# Altium PCB PX4FMUv1.7.1.PcbDoc (part 1 of 2)
Units mil, origin at the board's own origin, x right, y up, seen from the top; angles counter-clockwise.
Board outline 1988.19 x 1417.32 mil, 4 copper layers (Top, Route2, Route15, Bottom), stack 57.482 mil thick; 118 components, 107 nets, 492 pads, 250 vias.
Unrouted connection lines stored in the file: 62.
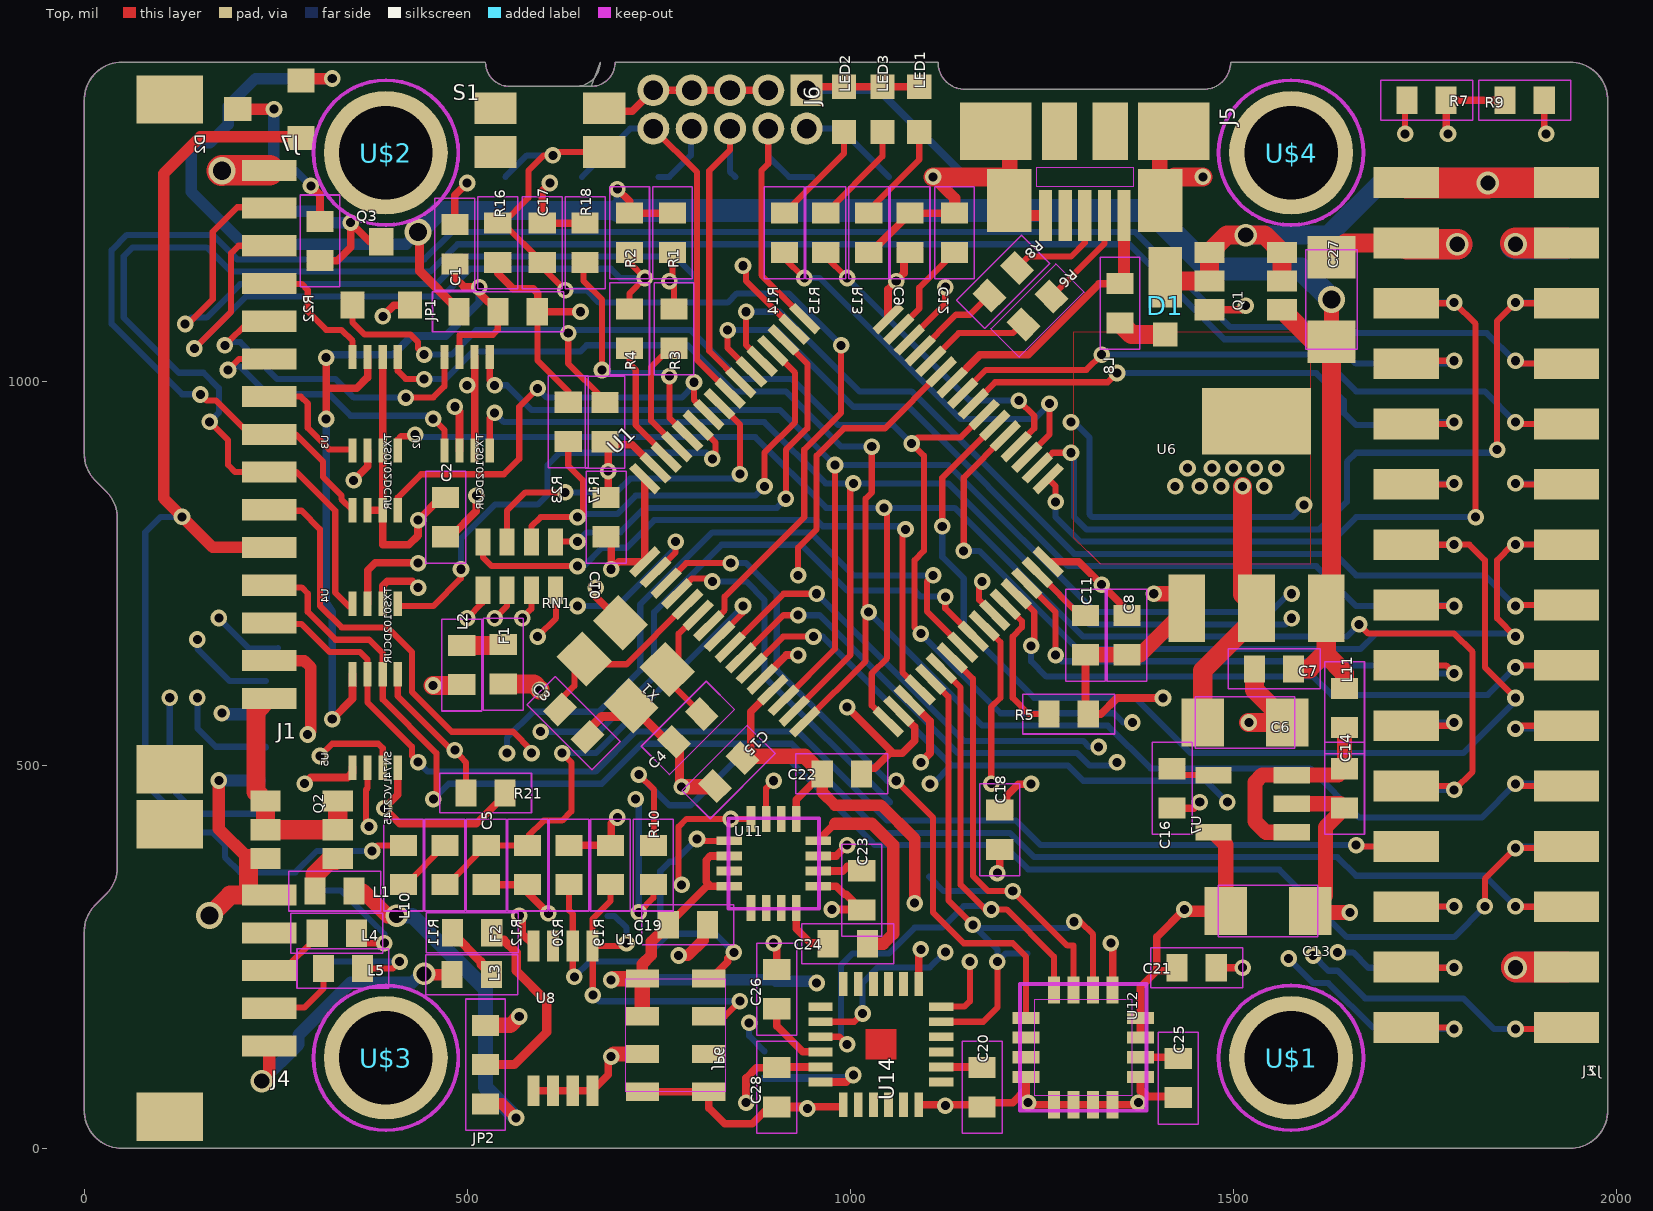
[diagram p0: Top view]
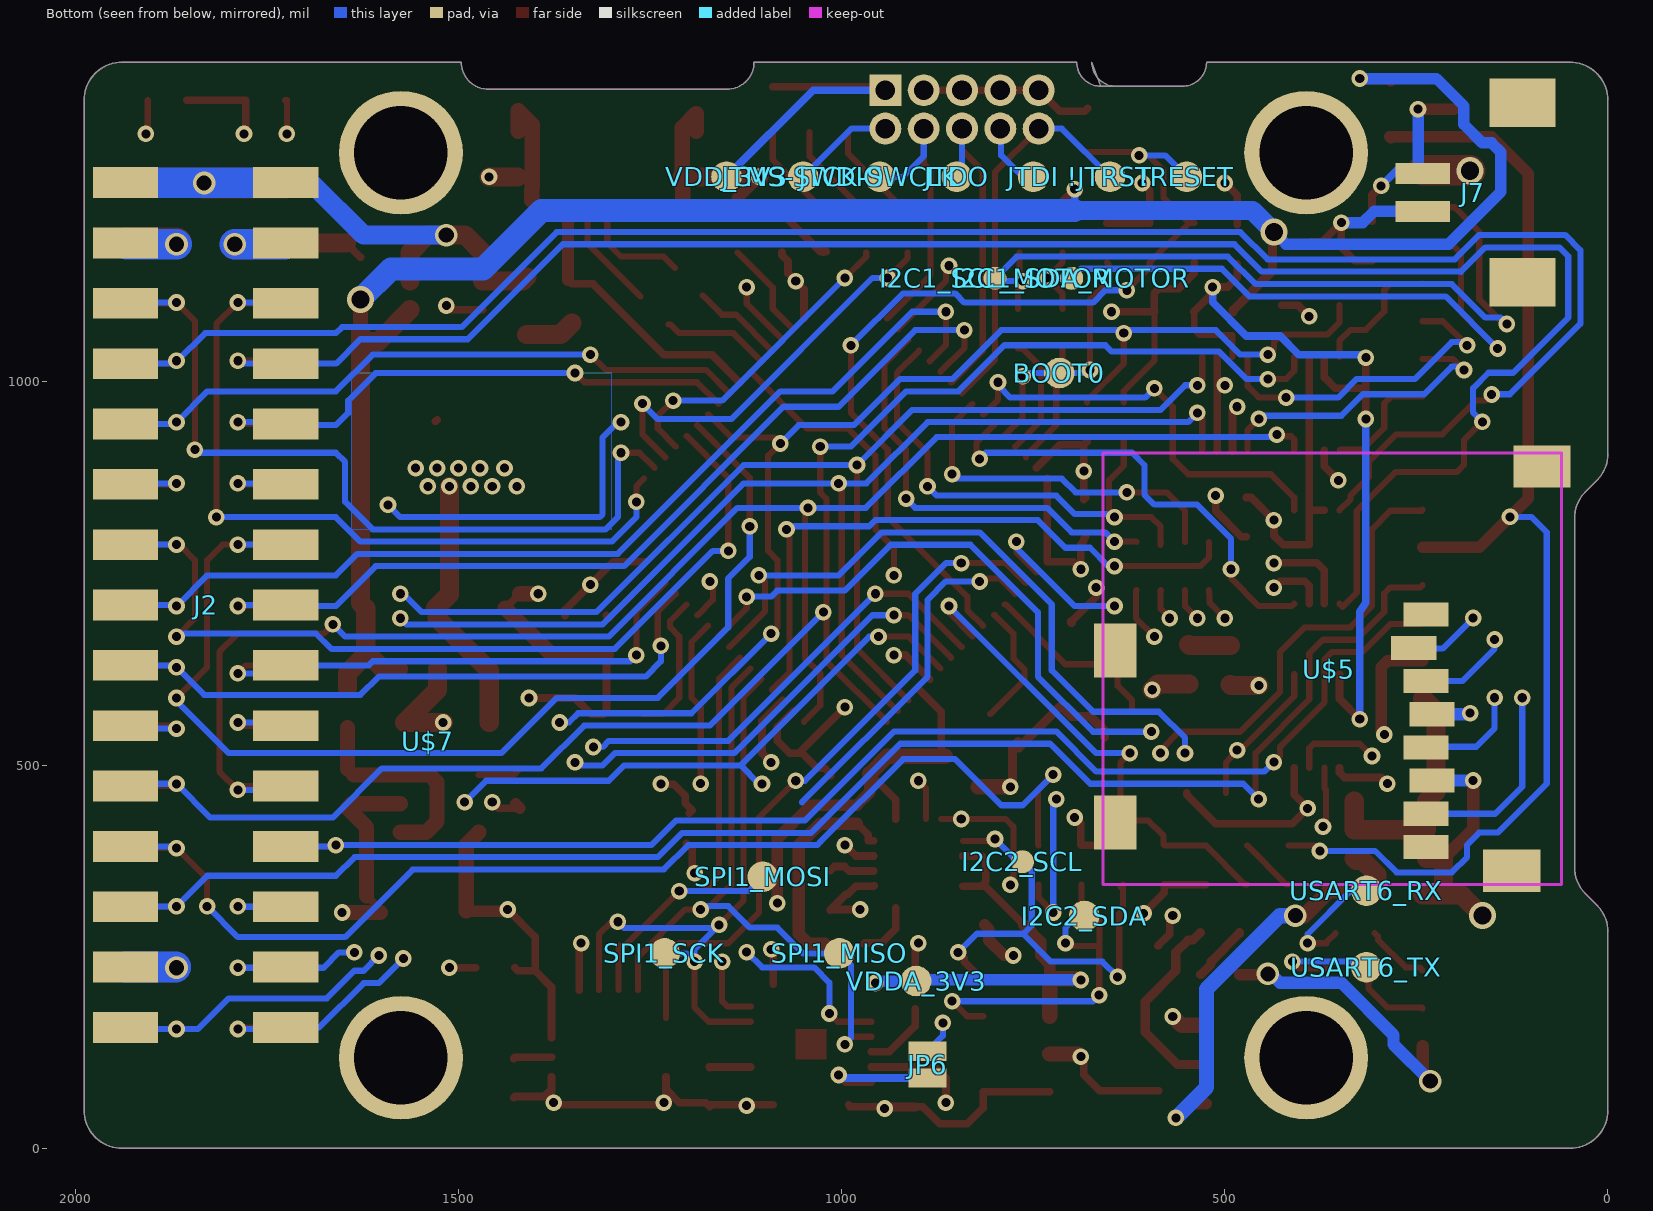
[diagram p1: Bottom view, seen from below]
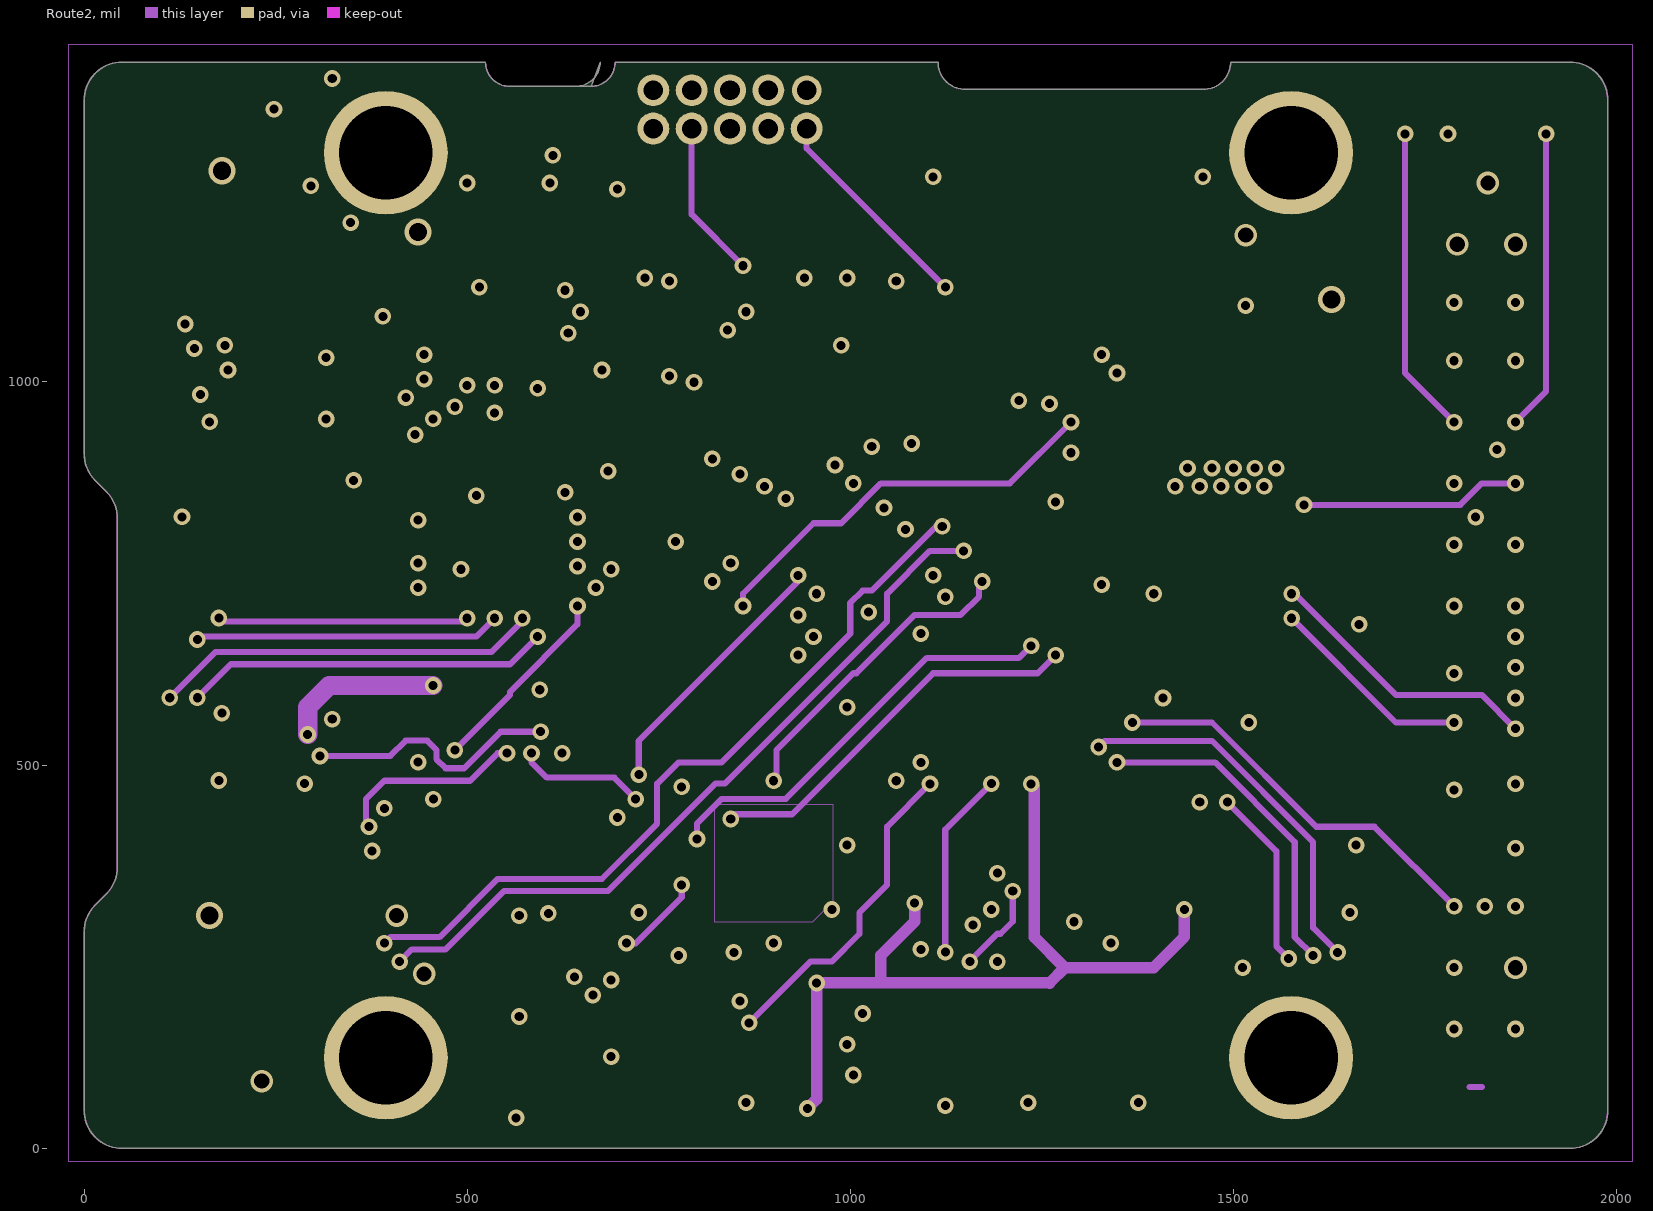
[diagram p2: Route2]
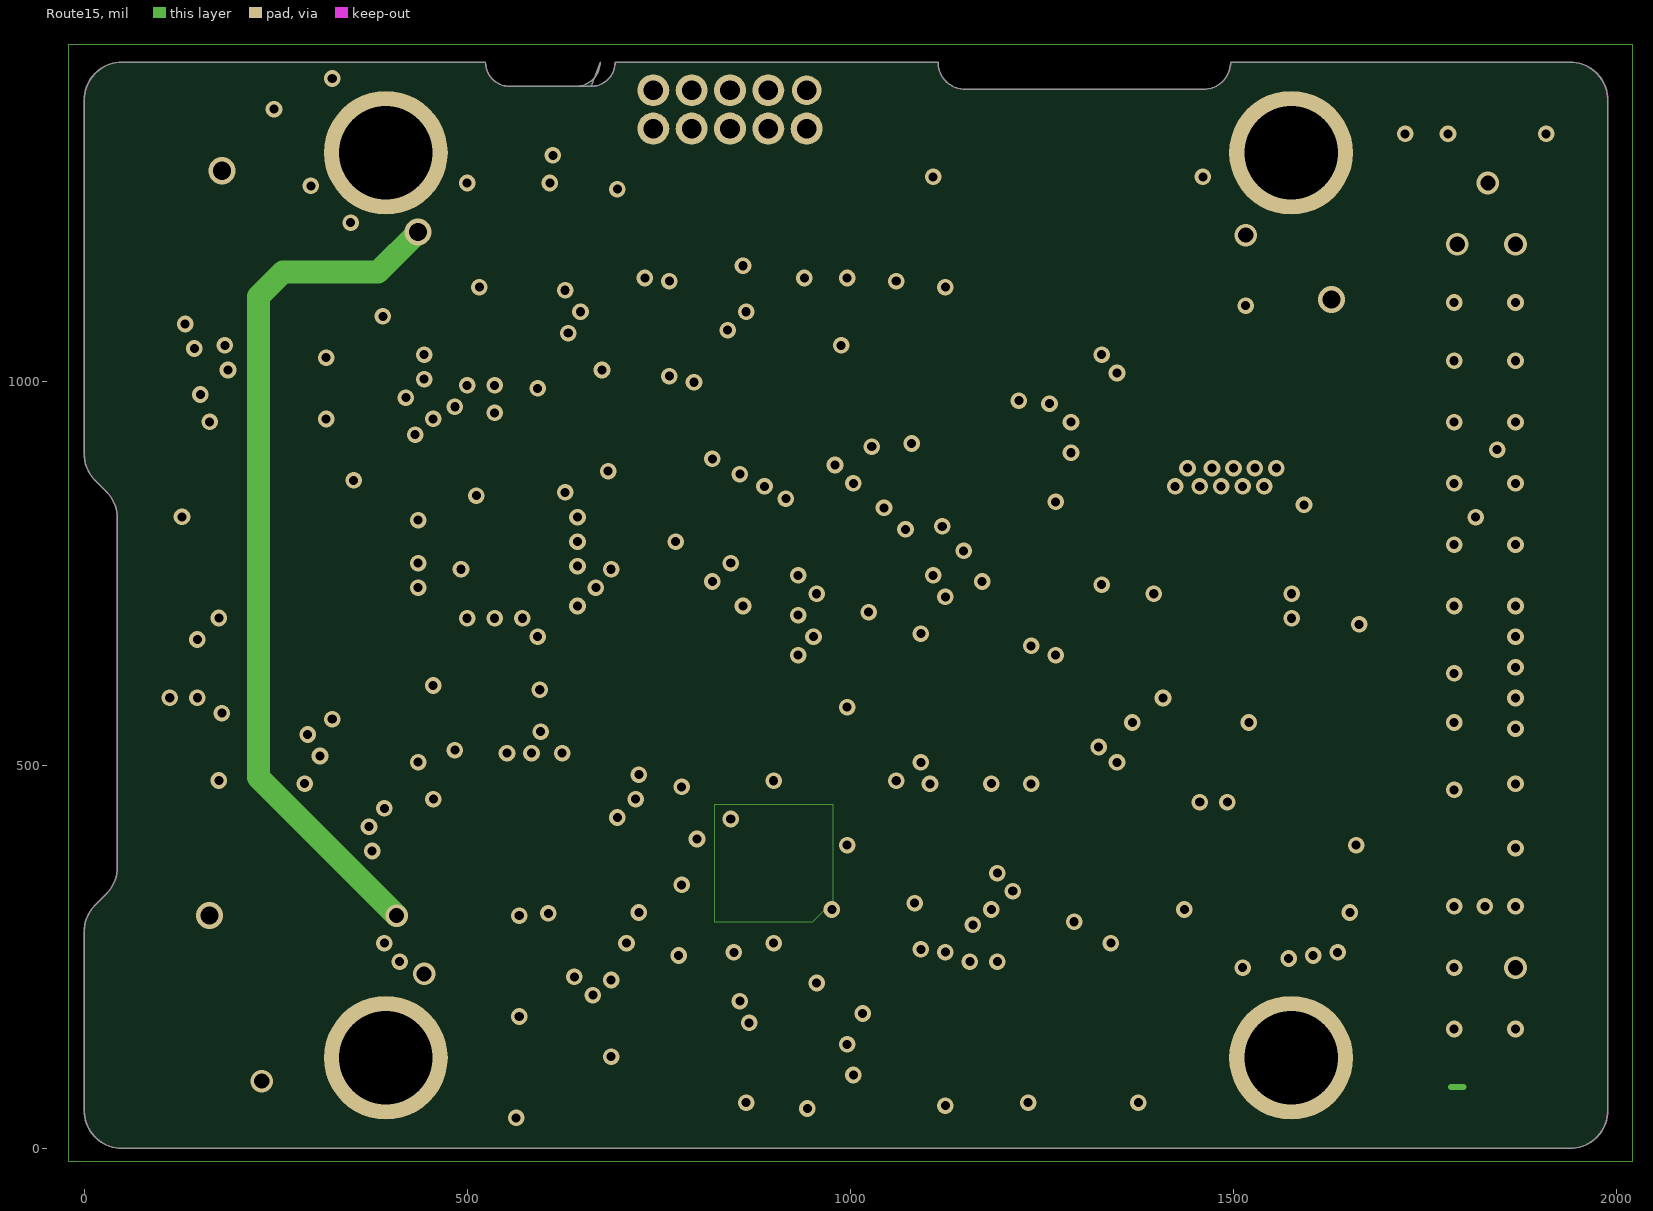
[diagram p3: Route15]

## Layer stack, top to bottom
Top Solder: solder mask 0.4, Solder Resist, Dk 3.5
Top: signal copper 1.378
Dielectric 1: core 19.685, FR-4, Dk 4.8
Route2: signal copper 1.378
Dielectric2: core 19.685, FR-4, Dk 4.8
Route15: signal copper 1.378
Dielectric3: dielectric 12.6, FR-4, Dk 4.8
Bottom: signal copper 1.378
Bottom Solder: solder mask 0.4, Solder Resist, Dk 3.5

## Board outline
661.42,1385.83 ccw(c661.43,1417.33) 692.92,1417.32 1114.18,1417.32 ccw(c1149.61,1417.32) 1149.61,1381.89 1460.63,1381.89 ccw(c1460.64,1417.33) 1496.07,1417.32 1938.98,1417.32 cw(c1938.98,1368.11) 1988.19,1368.11 1988.19,49.21 cw(c1938.98,49.21) 1938.98,0 49.22,0 cw(c49.22,49.22) 0,49.21 0,282.77 cw(c49.21,282.76) 14.42,317.56 28.9,332.04 ccw(c-5.9,366.83) 43.31,366.84 43.31,822.14 ccw(c-5.89,822.14) 28.9,856.93 14.42,871.41 cw(c49.22,906.22) 0,906.21 0,1368.11 cw(c49.22,1368.11) 49.22,1417.32 523.63,1417.32 ccw(c555.12,1417.32) 555.12,1385.83 661.42,1385.83 ccw(c641.74,1417.33)

## Design rules (kind name [scope] priority, off if disabled: settings)
BoardOutlineClearance mdCopperDimension [All] p1: gap=10 ignorepadtopadclearanceinfootprint=FALSE except(0: Arc-SplitContinuation Track-SplitContinuation SMDPad-SplitContinuation THPad-SplitContinuation Via-SplitContinuation Fill-SplitContinuation Poly-SplitContinuation Region-SplitContinuation Text-SplitContinuation; 7.87: Poly-OutlineEdge Poly-CavityEdge Poly-CutoutEdge Poly-SplitBarrior)
Clearance "Clearance (Same Net)" [All] p1: gap=5.91 ignorepadtopadclearanceinfootprint=FALSE
Clearance Clearance_for_NetClass_power [InNetClass('power') vs InNetClass('power')] p2: gap=8 ignorepadtopadclearanceinfootprint=FALSE
Clearance [All] p3: gap=5.91 ignorepadtopadclearanceinfootprint=FALSE
HoleSize HoleSize_For_NetClass_power [InNetClass('power')] p1: absolutevalues=TRUE maxlimit=11.81 minlimit=11.81 maxpercent=80.000 minpercent=20.000
HoleSize [All] p2: absolutevalues=TRUE maxlimit=100000 minlimit=11.81 maxpercent=80.000 minpercent=20.000
HoleToHoleClearance mdDrill [All] p1: gap=7.87 allowstackedmicrovias=TRUE
MinimumSolderMaskSliver [All] p1 off: minsoldermaskwidth=10
PasteMaskExpansion Expansion_SMDPaste_OFF [InPadClass('SMDPaste_OFF')] p1: expansion=0
PasteMaskExpansion mlMinCreamFrame [All] p2: expansion=-1
PolygonConnect PolygonConnect_For_PolygonThermal_ON_Width118100_Gap80000 [InPolygonClass('PolygonThermal_ON_Width118100_Gap80000') vs Not IsVia] p1: connectstyle=Relief reliefconductorwidth=11.81 reliefentries=4 polygonreliefangle="90 Angle" airgapwidth=8
PolygonConnect PolygonConnect_For_PolygonThermal_ON_Width100000_Gap80000 [InPolygonClass('PolygonThermal_ON_Width100000_Gap80000') vs Not IsVia] p2: connectstyle=Relief reliefconductorwidth=10 reliefentries=4 polygonreliefangle="90 Angle" airgapwidth=8
PolygonConnect PolygonConnect_For_PolygonThermal_ON_Width80000_Gap80000 [InPolygonClass('PolygonThermal_ON_Width80000_Gap80000') vs Not IsVia] p3: connectstyle=Relief reliefconductorwidth=8 reliefentries=4 polygonreliefangle="90 Angle" airgapwidth=8
PolygonConnect PolygonConnect_For_PolygonThermal_OFF [InPolygonClass('PolygonThermal_OFF')] p4: connectstyle=Direct reliefconductorwidth=10 reliefentries=4 polygonreliefangle="90 Angle" airgapwidth=10
PolygonConnect ThermalVias [IsVia] p5: connectstyle=Direct reliefconductorwidth=10 reliefentries=4 polygonreliefangle="90 Angle" airgapwidth=10
PolygonConnect [All] p6: connectstyle=Relief reliefconductorwidth=10 reliefentries=4 polygonreliefangle="90 Angle" airgapwidth=10
RoutingVias [All] p1: holewidth=11.81 width=21.65 viastyle="Through Hole" minholewidth=11.81 minwidth=21.65 maxholewidth=100 maxwidth=100
SolderMaskExpansion Expansion_SMDSolder_OFF [InPadClass('SMDSolder_OFF')] p1: expansion=0 istentingtop=FALSE
SolderMaskExpansion mlMinStopFrame [All] p2: expansion=1 istentingtop=FALSE
Width Width_For_NetClass_power [InNetClass('power')] p1: maxlimit=10 minlimit=10 preferedwidth=10
Width [All] p2: maxlimit=10000 minlimit=5.91 preferedwidth=5.91
26 further rules are at their usual default settings.

## Classes and differential pairs
polygon class PolygonThermal_ON_Width100000_Gap80000: Polygon_1_Net_GND Polygon_1_Net_POLY1 Polygon_1_Net_POLY2 Polygon_1_Net_VDD_3V3
polygon class PolygonThermal_ON_Width80000_Gap80000: Polygon_3_Net_VDD_3V3
polygon class PolygonThermal_OFF: Polygon_2_Net_VDD_3V3
pad class SMDSolder_OFF: RN1-1 RN1-2 RN1-3 RN1-4 RN1-5 RN1-6 RN1-7 RN1-8
pad class SMDPaste_OFF: !JTRST-P$1 !RESET-P$1 BOOT0-P$1 I2C1_SCL_MOTOR-P$1 I2C1_SDA_MOTOR-P$1 I2C2_SCL-P$1 I2C2_SDA-P$1 JP1-3 JP2-3 JP6-1 JP6-2 JTCK-SWCLK-P$1 JTDI-P$1 JTDO-P$1 JTMS-SWDIO-P$1 SPI1_MISO-P$1 SPI1_MOSI-P$1 SPI1_SCK-P$1 USART6_RX-P$1 USART6_TX-P$1 VDD_3V3-P$1 VDDA_3V3-P$1
net class power: GND N$23 N$24 N$27 N$100 VBUS VDD_3V3 VDD_3V3_ANALOG VDD_5V VDD_5V_IN VDD_IO

## Components (designator, comment, footprint, x,y, rotation, side; value= is the part's Value field where it differs from the comment)
!JTRST "" PAD.04X.04 649.61,1267.65 r225 bottom
!RESET "" PAD.04X.04 549.61,1267.65 r225 bottom
BOOT0 "" PAD.04X.04 715.69,1011.69 r180 bottom
C1 "0u1" 0402-CAP 483.69,1179.69 r90 top
C2 "0u1" 0402-CAP 471.69,823.68 r270 top
C3 "8p" 0402-CAP 638.76,554.76 r315 top
C4 "8p" 0402-CAP 787.76,548.61 r45 top
C5 "0u1" 0402-CAP 524.69,369.69 r270 top
C6 "10u" EIA3216 1514.69,555.68 r180 top
C7 "0u1" 0402-CAP 1552.69,625.68 r180 top
C8 "0u1" 0402-CAP 1360.69,669.68 r270 top
C9 "0u1" 0402-CAP 1077.69,1194.69 r90 top
C10 "0u1" 0402-CAP 681.08,823.68 r90 top
C11 "2u2" 0402-CAP 1306.69,669.68 r270 top
C12 "2u2" 0402-CAP 1135.69,1194.69 r90 top
C13 "10u" EIA3216 1544.69,309.69 r180 top
C14 "0u1" 0402-CAP 1644.69,469.69 r270 top
C15 "0u1" 0402-CAP 841.01,491.01 r225 top
C16 "470p" 0402-CAP 1419.69,469.69 r270 top
C17 "0u1" 0402-CAP 597.69,1181.69 r270 top
C18 "0u1" 0402-CAP 1194.69,415.69 r270 top
C19 "0u1" 0402-CAP 787.69,291.69 r0 top
C20 "0u01" 0402-CAP 1171.69,79.69 r270 top
C21 "0u1" 0402-CAP 1451.69,235.69 r0 top
C22 "0u1" 0402-CAP 988.69,488.69 r0 top
C23 "4u7" 0402-CAP 1014.69,336.69 r270 top
C24 "0u22" 0402-CAP 996.38,267 r0 top
C25 "0u01" 0402-CAP 1427.69,91.69 r270 top
C26 "2u2" 0402-CAP 903.69,207.69 r90 top
C27 "10u" EIA3216 1627.69,1107.69 r270 top
C28 "2u2" 0402-CAP 903.69,79.69 r90 top
D1 "MSS1P4-M3" MICROSMP 1410.69,1087.69 r270 top
D2 "BAT54C" SOT23-3 243.69,1356 r90 top
F1 "500mA" 0402-PTC 546.93,631.65 r90 top
F2 "200mA" 0402-PTC 506.31,281.29 r180 top
I2C1_SCL_MOTOR "" PAD.03X.03 799.64,1135.31 r180 bottom
I2C1_SDA_MOTOR "" PAD.03X.03 699.64,1135.31 r180 bottom
I2C2_SCL "" PAD.03X.03 763.91,374.02 r180 bottom
I2C2_SDA "" PAD.04X.04 683.08,303.15 r180 bottom
J1 "DF13-15P-1.25H" DF13A-15P-1.25H 111.69,931.69 r90 top
J2 "HEADER_2X15-REV" HEADER_2MM_2X15_REVERSE 1829.69,708.98 r270 bottom
J3 "HEADER_2X15" HEADER_2MM_2X15 1829.69,708.98 r90 top
J4 "DF13-5P-1.25H" DF13A-5P-1.25H 111.69,232 r90 top
J5 "47346-0001" MOLEX-47346-0001 1305.69,1327.37 r270 top
J6 "" FTSH-105-01-XXX-DV 942.69,1380.69 r180 top
J7 "DF13-2P-1.25H" DF13A-2P-1.25H 111.38,1248 r270 bottom
JP1 "0R" SJ_3_0603_PASTE1&2 565.69,1091.69 r180 top
JP2 "0R" SJ_3_0603_PASTE1&2 523.69,83.69 r90 top
JP6 "JUMPER-2" SJ_2 887.69,91.69 r270 bottom
JTCK-SWCLK "" PAD.04X.04 950.01,1267.65 r225 bottom
JTDI "" PAD.04X.04 749.61,1267.65 r225 bottom
JTDO "" PAD.04X.04 849.61,1267.65 r225 bottom
JTMS-SWDIO "" PAD.04X.04 1050.01,1267.65 r225 bottom
L1 "FERRITE" 0402-IND 326.69,335.69 r180 top
L2 "FERRITE" 0402-IND 492.69,630.68 r270 top
L3 "FERRITE" 0402-IND 505.69,226.69 r180 top
L4 "BLM15HD102SN1" 0402-IND 329.69,280.69 r180 top
L5 "BLM15HD102SN1" 0402-IND 337.69,234.69 r180 top
L8 "FERRITE" 0402-IND 1351.69,1102.69 r90 top
L10 "BLM15HD102SN1" 0402-IND 416.69,369.69 r90 top
L11 "FERRITE" 0402-IND 1644.69,574.68 r270 top
LED1 "GREEN" LED-0603 1089.69,1355.69 r180 top
LED2 "AMBER" LED-0603 991.69,1355.69 r180 top
LED3 "BLUE" LED-0603 1041.69,1355.69 r180 top
Q1 "NTGS4111P" TSOP-6@1 1515.69,1131.69 r270 top
Q2 "NTGS4111P" TSOP-6@1 283.69,415.69 r270 top
Q3 "ZXMS6004FFTA" SOT23-3 387.69,1139.69 r0 top
R1 "1K5" 0402-RES 767.69,1194.69 r90 top
R2 "1K5" 0402-RES 711.69,1194.69 r90 top
R3 "100" 0402-RES 769.69,1069.69 r90 top
R4 "100" 0402-RES 711.69,1069.69 r90 top
R5 "10K" 0402-RES 1284.69,566.68 r0 top
R6 "22R" 0402-RES 1243.95,1093.32 r225 top
R7 "1K5" 0402-RES 1751.69,1367.69 r0 top
R8 "22R" 0402-RES 1199.22,1130.73 r225 top
R9 "1K5" 0402-RES 1879.69,1367.69 r180 top
R10 "1K0" 0402-RES 742.69,369.69 r270 top
R11 "47K/0.1%" 0402-RES 470.69,369.69 r90 top
R12 "10K/0.1%" 0402-RES 578.69,369.69 r90 top
R13 "270R" 0402-RES 1023.69,1194.69 r90 top
R14 "270R" 0402-RES 913.69,1194.69 r90 top
R15 "82R" 0402-RES 967.69,1194.69 r90 top
R16 "10K" 0402-RES 539.69,1181.69 r270 top
R17 "10K" 0402-RES 679.69,947.69 r90 top
R18 "10K" 0402-RES 653.69,1181.69 r270 top
R19 "1K5" 0402-RES 686.69,369.69 r90 top
R20 "1K5" 0402-RES 632.69,369.69 r90 top
R21 "10K" 0402-RES 523.69,463.69 r180 top
R22 "10K" 0402-RES 307.69,1184 r90 top
R23 "10K" 0402-RES 631.69,948 r90 top
RN1 "CTS742C083" CTS742C083 567.69,759.68 r180 top
S1 "RESET" EVQP7J01K 607.69,1328.69 r180 top
SPI1_MISO "" PAD.04X.04 1002.68,254.33 r225 bottom
SPI1_MOSI "" PAD.04X.04 1102.68,354.33 r180 bottom
SPI1_SCK "" PAD.04X.04 1230.68,254.33 r225 bottom
U1 "STM32F405RGT6" TQFP64 994.69,819.68 r45 top
U2 "TXS0102DCUR" TI-DCU 499.69,971.69 r0 top
U3 "TXS0102DCUR" TI-DCU 379.69,971.69 r0 top
U4 "TXS0102DCUR" TI-DCU 379.69,771.68 r0 top
U5 "SN74LVC2T45" TI-DCU 379.69,557.68 r0 top
U6 "LD1117AS33" SOT-223 1529.69,826.68 r0 top
U7 "MIC5207" SOT23-5 1524.69,449.69 r90 top
U8 "128KBit EEPROM" MSOP-8 624.69,169.69 r0 top
U10 "MS5611-01BA" MS5611-01BA 771.69,147.69 r0 top
U11 "HMC5883L" HMC5883L-MAN 899.69,371.69 r0 top
U12 "L3GD20" L3G4200DH-MAN 1303.69,131.69 r270 top
U14 "MPU-6000" QFN-24 1039.69,135.69 r270 top
U$1 "" MOUNT-HOLE3.1 1574.81,118.11 r0 top
U$2 "" MOUNT-HOLE3.1 393.71,1299.21 r0 top
U$3 "" MOUNT-HOLE3.1 393.71,118.11 r0 top
U$4 "" MOUNT-HOLE3.1 1574.81,1299.21 r0 top
U$5 "" MICROSD 343.69,620 r270 bottom
U$7 "" OSHW-LOGO-S 1539.69,531.68 r180 bottom
USART6_RX "" PAD.04X.04 314.97,336.22 r180 bottom
USART6_TX "" PAD.04X.04 314.97,236.22 r180 bottom
VDD_3V3 "" PAD.04X.04 1150.01,1267.65 r225 bottom
VDDA_3V3 "" PAD.04X.04 902.68,218.33 r180 bottom
X1 "24 MHz 3.2x2.5mm 8-10pf" OSCILLATOR-3.2X2.5 706.69,631.68 r135 top

## Footprints (in the part's own frame and the unit in brackets; to place one, negate y for a bottom-side part, rotate by r counter-clockwise, add the part's x,y. Pads: shape width x height; smd on the part's side, far side on the other; paste and mask are expansions set on the pad)
0402-CAP [mm] "0402-CAP"
  rect 0.7x0.9 smd: 1(-0.65,0) 2(0.65,0)
  Top keep-out lines w0.051: -1.524,0.66 -1.524,-0.66 1.524,-0.66 1.524,0.66 -1.524,0.66
  body extent -1.55,-0.69 1.55,0.69, height 3.81
0402-IND [mm] "0402-IND"
  rect 0.7x0.9 smd: 1(-0.65,0) 2(0.65,0)
  Top keep-out lines w0.051: 1.524,0.66 1.524,-0.66 -1.524,-0.66 -1.524,0.66 1.524,0.66
  body extent -1.55,-0.69 1.55,0.69, height 3.81
0402-PTC [mm] "0402-PTC"
  rect 0.7x0.9 smd: 1(-0.65,0) 2(0.65,0)
  Top keep-out lines w0.051: -1.524,0.66 -1.524,-0.66 1.524,-0.66 1.524,0.66 -1.524,0.66
  body extent -1.55,-0.69 1.55,0.69, height 3.81
0402-RES [mm] "0402-RES"
  rect 0.7x0.9 smd: 1(-0.65,0) 2(0.65,0)
  Top keep-out lines w0.051: -1.524,0.66 -1.524,-0.66 1.524,-0.66 1.524,0.66 -1.524,0.66
  body extent -1.55,-0.69 1.55,0.69, height 3.81
CTS742C083 [mil] "CTS742C083"
  rect 19.69x35.43 smd mask+0: 1(-47.24,-31.5) 2(-15.75,-31.5) 3(15.75,-31.5) 4(47.24,-31.5) 5(47.24,31.5) 6(15.75,31.5) 7(-15.75,31.5) 8(-47.24,31.5)
  body extent -63,-51 63,51, height 150
DF13A-2P-1.25H [mil] "DF13A-2P-1.25H"
  rect 27.56x70.87 smd: 1(-23.82,-129.92) 2(25.39,-129.92)
  rect 62.99x86.61 smd: S1(117.91,0) S2(-116.34,0)
  body extent -148,-165 149,43, height 50
DF13A-5P-1.25H [mil] "DF13A-5P-1.25H"
  rect 27.56x70.87 smd: 1(-98.43,-129.92) 2(-49.21,-129.92) 3(0,-129.92) 4(49.21,-129.92) 5(98.43,-129.92)
  rect 62.99x86.61 smd: S1(190.94,0) S2(-190.94,0)
  body extent -222,-165 222,103, height 150
DF13A-15P-1.25H [mm] "DF13A-15P-1.25H"
  rect 0.7x1.8 smd: 1(-8.75,-3.3) 2(-7.5,-3.3) 3(-6.25,-3.3) 4(-5,-3.3) 5(-3.75,-3.3) 6(-2.5,-3.3) 7(-1.25,-3.3) 8(0,-3.3) 9(1.25,-3.3) 10(2.5,-3.3) 11(3.75,-3.3) 12(5,-3.3) 13(6.25,-3.3) 14(7.5,-3.3) 15(8.75,-3.3)
  rect 1.6x2.2 smd: S1(11.1,0) S2(-11.1,0)
  body extent -11.9,-4.2 11.9,2.61, height 3.81
EIA3216 [mil] "EIA3216"
  rect 55.12x62.99 smd: A(55.12,0) C(-55.12,0)
  Top keep-out lines w1.97: 64.96,33.46 64.96,-33.46 -64.96,-33.46 -64.96,33.46 64.96,33.46
  body extent -83,-38 83,38, height 150
EVQP7J01K [mil] "EVQP7J01K"
  rect 55.12x41.34 smd: A1(-70.87,28.54) A2(70.87,28.54) B3(-70.87,-28.54) B4(70.87,-28.54)
  body extent -98,-85 98,59, height 150
FTSH-105-01-XXX-DV [mm] "FTSH-105-01-XXX-DV"
  rect 1.06x1.06 / inner round 0.979 / far side rect 1.06x1.06 hole 0.65: 1(0,0)
  round 1.06 hole 0.65: 2(0,1.27) 3(1.27,0) 4(1.27,1.27) 5(2.54,0) 6(2.54,1.27) 7(3.81,0) 8(3.81,1.27) 9(5.08,0) 10(5.08,1.27)
  body extent -0.54,-0.54 5.62,1.81, height 1.27
HEADER_2MM_2X15 [mm] "HEADER_2MM_2X15"
  rect 1.02x2.16 smd: 1(14,-2.655) 2(14,2.655) 3(12,-2.655) 4(12,2.655) 5(10,-2.655) 6(10,2.655) 7(8,-2.655) 8(8,2.655) 9(6,-2.655) 10(6,2.655) 11(4,-2.655) 12(4,2.655) 13(2,-2.655) 14(2,2.655) 15(0,-2.655) 16(0,2.655) 17(-2,-2.655) 18(-2,2.655) 19(-4,-2.655) 20(-4,2.655) 21(-6,-2.655) 22(-6,2.655) 23(-8,-2.655) 24(-8,2.655) 25(-10,-2.655) 26(-10,2.655) 27(-12,-2.655) 28(-12,2.655) 29(-14,-2.655) 30(-14,2.655)
  body extent -15.36,-3.74 15.36,3.74, height 3.81
HEADER_2MM_2X15_REVERSE [mm] "HEADER_2MM_2X15_REVERSE"
  rect 1.02x2.16 smd: 1(-14,-2.655) 2(-14,2.655) 3(-12,-2.655) 4(-12,2.655) 5(-10,-2.655) 6(-10,2.655) 7(-8,-2.655) 8(-8,2.655) 9(-6,-2.655) 10(-6,2.655) 11(-4,-2.655) 12(-4,2.655) 13(-2,-2.655) 14(-2,2.655) 15(0,-2.655) 16(0,2.655) 17(2,-2.655) 18(2,2.655) 19(4,-2.655) 20(4,2.655) 21(6,-2.655) 22(6,2.655) 23(8,-2.655) 24(8,2.655) 25(10,-2.655) 26(10,2.655) 27(12,-2.655) 28(12,2.655) 29(14,-2.655) 30(14,2.655)
  body extent -14.51,-3.74 14.51,3.74, height 1.27
HMC5883L-MAN [mm] "HMC5883L-MAN"
  rect 0.85x0.285 smd: 1(-1.475,0.75) 2(-1.475,0.25) 3(-1.475,-0.25) 4(-1.475,-0.75) 9(1.475,-0.75) 10(1.475,-0.25) 11(1.475,0.25) 12(1.475,0.75)
  rect 0.285x0.85 smd: 5(-0.75,-1.475) 6(-0.25,-1.475) 7(0.25,-1.475) 8(0.75,-1.475) 13(0.75,1.475) 14(0.25,1.475) 15(-0.25,1.475) 16(-0.75,1.475)
  Top keep-out lines w0.127: -1.5,-1.5 -1.5,1.5 1.5,1.5 1.5,-1.5 -1.5,-1.5
  body extent -1.9,-1.9 1.9,1.9, height 3.81
L3G4200DH-MAN [mil] "L3G4200DH-MAN"
  rect 35.43x15.75 smd: 1(-74.8,38.39) 2(-74.8,12.8) 3(-74.8,-12.8) 4(-74.8,-38.39) 9(74.8,-38.39) 10(74.8,-12.8) 11(74.8,12.8) 12(74.8,38.39)
  rect 15.75x35.43 smd: 5(-38.39,-74.8) 6(-12.8,-74.8) 7(12.8,-74.8) 8(38.39,-74.8) 13(38.39,74.8) 14(12.8,74.8) 15(-12.8,74.8) 16(-38.39,74.8)
  Top keep-out region: -62.99,-62.99 -62.99,62.99 62.99,62.99 62.99,-62.99
  Top keep-out lines w5: 82.68,-82.68 -82.68,-82.68 -82.68,82.68 82.68,82.68 82.68,-82.68
  body extent -93,-93 93,93, height 150
LED-0603 [mil] "LED-0603"
  rect 31.5x31.5 smd: A(0,-29.53) C(0,29.53)
  body extent -16,-45 16,45, height 50
MICROSD [mil] "MICROSD"
  rect 31.5x59.06 smd: 1(-76.38,106.3) 2(-33.07,90.55) 3(10.24,106.3) 4(53.54,114.17) 5(96.85,106.3) 6(140.16,114.17) 7(183.46,106.3) 8(226.77,106.3)
  rect 55.12x74.8 smd: NC(-269.69,257.87) NC3(257.87,218.5)
  rect 70.87x55.12 smd: NC1(-29.53,-299.21) NC2(194.88,-299.21)
  Top keep-out lines w3.94: 275.59,283.46 275.59,-314.96 -287.4,-314.96 -287.4,283.46 275.59,283.46
  body extent -297,-327 285,295, height 150
MICROSMP [mil] "MICROSMP"
  rect 31.5x31.5 smd: ANODE(25.59,0)
  rect 78.74x43.31 smd: CATHODE(-49.21,0)
  body extent -89,-27 41,27, height 150
MOLEX-47346-0001 [mm] "MOLEX-47346-0001"
  rect 1.7x0.44 smd: D+(2.8,0) D-(2.8,0.65) GND(2.8,-1.3) ID(2.8,-0.65) VBUS(2.8,1.3)
  rect 1.9x2.375 smd: GND1(0,2.95) GND4(0,-2.95)
  rect 2.1x1.475 smd: GND2(2.3,2.5) GND3(2.3,-2.5)
  rect 1.9x1.175 smd: GND5(0,-0.837) GND6(0,0.837)
  Top keep-out region: 1.2,-1.6 1.2,1.6 1.85,1.6 1.85,-1.6
  body extent -2.36,-4.76 3.76,4.66, height 3.81
MOUNT-HOLE3.1 [mil] "MOUNT-HOLE3.1"
  round 161.42 hole 122.05: P$1(0,0)
  Top keep-out circle w5: c0,0 r94.49
  body extent -97,-97 97,97, height 150
MS5611-01BA [mil] "MS5611-01BA"
  rect 43.31x23.62 smd: 1(-43.31,73.82) 2(-43.31,24.61) 3(-43.31,-24.61) 4(-43.31,-73.82) 5(43.31,-73.82) 6(43.31,-24.61) 7(43.31,24.61) 8(43.31,73.82)
  Top keep-out region: -64.96,-73.82 -64.96,73.82 64.96,73.82 64.96,-73.82
  body extent -65,-101 65,101, height 150
MSOP-8 [mil] "MSOP-8"
  rect 15.75x40.16 smd: 1(-38.39,-94.49) 2(-12.8,-94.49) 3(12.8,-94.49) 4(38.39,-94.49) 5(38.39,94.49) 6(12.8,94.49) 7(-12.8,94.49) 8(-38.39,94.49)
  body extent -63,-115 63,115, height 150
OSCILLATOR-3.2X2.5 [mil] "OSCILLATOR-3.2X2.5"
  rect 55.12x47.24 smd: 1(-43.31,-33.46) 2(43.31,-33.46) 3(43.31,33.46) 4(-43.31,33.46)
  body extent -71,-57 71,57, height 50
OSHW-LOGO-S [mil] "OSHW-LOGO-S"
PAD.03X.03 [mil] "PAD.03X.03"
  rrect100% 30x30 smd paste+0: P$1(0,0)
  body extent -15,-15 15,15, height 50
PAD.04X.04 [mil] "PAD.04X.04"
  rrect100% 40x40 smd paste+0: P$1(0,0)
  body extent -20,-20 20,20, height 50
QFN-24 [mil] "QFN-24"
  rect 31.5x11.42 smd: 1(-78.74,49.21) 2(-78.74,29.53) 3(-78.74,9.84) 4(-78.74,-9.84) 5(-78.74,-29.53) 6(-78.74,-49.21) 13(78.74,-49.21) 14(78.74,-29.53) 15(78.74,-9.84) 16(78.74,9.84) 17(78.74,29.53) 18(78.74,49.21)
  rect 11.42x31.5 smd: 7(-49.21,-78.74) 8(-29.53,-78.74) 9(-9.84,-78.74) 10(9.84,-78.74) 11(29.53,-78.74) 12(49.21,-78.74) 19(49.21,78.74) 20(29.53,78.74) 21(9.84,78.74) 22(-9.84,78.74) 23(-29.53,78.74) 24(-49.21,78.74)
  Top region: -19.69,-19.69 -19.69,19.69 19.69,19.69 19.69,-19.69
  body extent -94,-94 94,94, height 150
SJ_2 [mil] "SJ_2"
  rect 25x50 smd paste+0: 1(-35,0) 2(0,0)
  body extent -48,-25 13,25, height 50
SJ_3_0603_PASTE1&2 [mm] "SJ_3_0603_PASTE1&2"
  rect 0.7x0.9 smd: 1(-0.65,0) 2(0.65,0)
  rect 0.7x0.9 smd paste+0: 3(1.95,0)
  Top keep-out lines w0.051: 2.824,0.66 2.824,-0.66 -1.524,-0.66 -1.524,0.66 2.824,0.66
  body extent -1.55,-0.69 2.85,0.69, height 3.81
SOT23-3 [mil] "SOT23-3"
  rect 31.5x35.43 smd: 1(-37.4,-39.37) 2(37.4,-39.37) 3(0,43.31)
  body extent -59,-57 59,61, height 150
SOT23-5 [mil] "SOT23-5"
  rect 21.65x47.24 smd: 1(-37.4,-51.19) 2(0,-51.19) 3(37.4,-51.19) 4(37.4,51.19) 5(-37.4,51.19)
  body extent -58,-75 58,75, height 150
SOT-223 [mil] "SOT-223"
  rect 48x88 smd: 1(-91,-122) 2(0,-122) 3(91,-122)
  rect 141.73x86.61 smd: 4(0,122.01)
  body extent -115,-166 115,165, height 150
TI-DCU [mil] "TI-DCU"
  rect 10.63x31.5 smd: 1(-29.53,-61.02) 2(-9.84,-61.02) 3(9.84,-61.02) 4(29.53,-61.02) 5(29.53,61.02) 6(9.84,61.02) 7(-9.84,61.02) 8(-29.53,61.02)
  body extent -45,-77 45,77, height 150
TQFP64 [mm] "TQFP64"
  rect 1.2x0.29 smd: 1(-5.7,3.75) 2(-5.7,3.25) 3(-5.7,2.75) 4(-5.7,2.25) 5(-5.7,1.75) 6(-5.7,1.25) 7(-5.7,0.75) 8(-5.7,0.25) 9(-5.7,-0.25) 10(-5.7,-0.75) 11(-5.7,-1.25) 12(-5.7,-1.75) 13(-5.7,-2.25) 14(-5.7,-2.75) 15(-5.7,-3.25) 16(-5.7,-3.75) 33(5.7,-3.75) 34(5.7,-3.25) 35(5.7,-2.75) 36(5.7,-2.25) 37(5.7,-1.75) 38(5.7,-1.25) 39(5.7,-0.75) 40(5.7,-0.25) 41(5.7,0.25) 42(5.7,0.75) 43(5.7,1.25) 44(5.7,1.75) 45(5.7,2.25) 46(5.7,2.75) 47(5.7,3.25) 48(5.7,3.75)
  rect 0.29x1.2 smd: 17(-3.75,-5.7) 18(-3.25,-5.7) 19(-2.75,-5.7) 20(-2.25,-5.7) 21(-1.75,-5.7) 22(-1.25,-5.7) 23(-0.75,-5.7) 24(-0.25,-5.7) 25(0.25,-5.7) 26(0.75,-5.7) 27(1.25,-5.7) 28(1.75,-5.7) 29(2.25,-5.7) 30(2.75,-5.7) 31(3.25,-5.7) 32(3.75,-5.7) 49(3.75,5.7) 50(3.25,5.7) 51(2.75,5.7) 52(2.25,5.7) 53(1.75,5.7) 54(1.25,5.7) 55(0.75,5.7) 56(0.25,5.7) 57(-0.25,5.7) 58(-0.75,5.7) 59(-1.25,5.7) 60(-1.75,5.7) 61(-2.25,5.7) 62(-2.75,5.7) 63(-3.25,5.7) 64(-3.75,5.7)
  body extent -6.3,-6.3 6.3,6.3, height 3.81
TSOP-6@1 [mm] "TSOP-6@1"
  rect 0.7x1 smd: 1(-0.95,-1.2) 2(0,-1.2) 3(0.95,-1.2) 4(0.95,1.2) 5(0,1.2) 6(-0.95,1.2)
  body extent -1.61,-1.7 1.61,1.7, height 3.81

## Part data
!JTRST !RESET BOOT0 I2C2_SDA JTCK-SWCLK JTDI JTDO JTMS-SWDIO SPI1_MISO SPI1_MOSI SPI1_SCK USART6_RX USART6_TX VDD_3V3 VDDA_3V3: library part PAD.04X.04, PackageName=PAD.04X.04
C1 C2 C3 C4 C5 C7 C8 C9 C10 C11 C12 C14 C15 C16 C17 C18 C19 C20 C21 C22 C23 C24 C25 C26 C28: library part 0402-CAP, PackageName=0402-CAP
C6 C13 C27: library part EIA3216, PackageName=EIA3216
D1: library part MICROSMP, PackageName=MICROSMP
D2 Q3: library part SOT23-3, PackageName=SOT23-3
F1 F2: library part 0402-PTC, PackageName=0402-PTC
I2C1_SCL_MOTOR I2C1_SDA_MOTOR I2C2_SCL: library part PAD.03X.03, PackageName=PAD.03X.03
J1: library part DF13A-15P-1.25H, PackageName=DF13A-15P-1.25H
J2: library part HEADER_2MM_2X15_REVERSE, PackageName=HEADER_2MM_2X15_REVERSE
J3: library part HEADER_2MM_2X15, PackageName=HEADER_2MM_2X15
J4: library part DF13A-5P-1.25H, PackageName=DF13A-5P-1.25H
J5: library part MOLEX-47346-0001, PackageName=MOLEX-47346-0001
J6: library part FTSH-105-01-XXX-DV, PackageName=FTSH-105-01-XXX-DV
J7: library part DF13A-2P-1.25H, PackageName=DF13A-2P-1.25H
JP1 JP2: library part SJ_3_0603_PASTE1&2, PackageName=SJ_3_0603_PASTE1&2
JP6: library part SJ_2, PackageName=SJ_2
L1 L2 L3 L4 L5 L8 L10 L11: library part 0402-IND, PackageName=0402-IND
LED1 LED2 LED3: library part LED-0603, PackageName=LED-0603
Q1 Q2: library part TSOP-6@1, PackageName=TSOP-6@1
R1 R2 R3 R4 R5 R6 R7 R8 R9 R10 R11 R12 R13 R14 R15 R16 R17 R18 R19 R20 R21 R22 R23: library part 0402-RES, PackageName=0402-RES
S1: library part EVQP7J01K, PackageName=EVQP7J01K
U1: library part TQFP64, PackageName=TQFP64
U2 U3 U4 U5: library part TI-DCU, PackageName=TI-DCU
U6: library part SOT-223, PackageName=SOT-223
U7: library part SOT23-5, PackageName=SOT23-5
U8: library part MSOP-8, PackageName=MSOP-8
U11: library part HMC5883L-MAN, PackageName=HMC5883L-MAN
U12: library part L3G4200DH-MAN, PackageName=L3G4200DH-MAN
U14: library part QFN-24, PackageName=QFN-24
U$1 U$2 U$3 U$4: library part MOUNT-HOLE3.1, PackageName=MOUNT-HOLE3.1
U$5: library part MICROSD, PackageName=MICROSD
U$7: library part OSHW-LOGO-S, PackageName=OSHW-LOGO-S
X1: library part OSCILLATOR-3.2X2.5, PackageName=OSCILLATOR-3.2X2.5
RN1: PackageName=CTS742C083
U10: PackageName=MS5611-01BA

## Via types
v1: diameter 21.65/21.65/21.65/21.65 (per signal layer), hole 11.81, Top to Bottom, 238 vias
v2: diameter 29.54/29.54/29.54/29.54 (per signal layer), hole 19.69, Top to Bottom, 8 vias
v3: diameter 35.43/35.43/35.43/35.43 (per signal layer), hole 23.62, Top to Bottom, 4 vias

## Nets (pads, with @x,y where several pads share a name; then routed paths per layer and width w, separated by ;. In a path a pad name is that pad's centre, name@x,y a point inside that pad or via, vN(x,y) a via of type N, cw(c..) or ccw(c..) an arc to the next point about the centre after c; other vN are vias at no path point)
!JTRST: !JTRST.P$1 J6.10 U1.56 | length 506.1
  Top w8: J6.10@742.69,1330.69 799.69,1273.69 799.69,1028.6 U1.56@842.97,985.32
  Bottom w8: !JTRST.P$1@649.61,1267.65 712.64,1330.69 J6.10@742.69,1330.69
ACCEL_CS: U1.4 | length 466.1
  Top w8: U1.4@773.37,723.63 793.42,743.68 815.69,743.68 v1(819.69,739.68)
  Bottom w8: v1(819.69,739.68) 863.69,739.68 887.69,715.68 887.69,615.68 1051.69,451.69
ADC123_IN10: C5.1 J2.11 J3.11 R11.1 R12.2 U1.8 | length 2039.2
  Top w8: R11.1@470.69,344.1 473.51,344.09 C5.1@524.69,395.28 R12.2@578.69,395.28 579.69,396.28 579.69,407.69 599.69,427.69 623.69,427.69 635.69,439.69 635.69,503.69 v1(623.69,515.68) ; U1.8@829.05,667.96 859.69,698.6 v1(859.69,707.68) ; v1(1867.69,867.69) 1868.92,866.46 J3.11@1934.22,866.46
  Route2 w8: v1(859.69,707.68) 859.69,723.68 951.69,815.68 987.69,815.68 1039.69,867.69 1207.69,867.69 v1(1287.69,947.69) ; v1(1591.69,839.69) 1795.69,839.69 1823.69,867.69 v1(1867.69,867.69)
  Bottom w8: v1(623.69,515.68) 667.69,515.68 v1(859.69,707.68) ; v1(1287.69,947.69) 1291.69,947.69 1311.69,927.69 1311.69,827.68 1315.69,823.68 1575.69,823.68 v1(1591.69,839.69) ; v1(1867.69,867.69) 1932.99,867.69 J2.11@1934.22,866.46
ADC123_IN11: J2.28 J3.28 U1.9 | length 1313.7
  Top w8: U1.9@842.97,654.04 912.61,723.68 v1(955.69,723.68) ; J3.28@1725.16,236.54 1724.31,235.69 v1(1787.69,235.69)
  Route2 w8: v1(1323.69,523.68) 1331.69,531.68 1471.69,531.68 1603.69,399.69 1603.69,287.69 v1(1635.69,255.69)
  Bottom w8: v1(955.69,723.68) 1147.69,531.68 1303.69,531.68 1311.69,523.68 v1(1323.69,523.68) ; v1(1635.69,255.69) 1655.69,255.69 1675.69,235.69 J2.28@1724.31,235.69 ; J2.28@1725.16,236.54 J2.28@1724.31,235.69 ; v1(1787.69,235.69) J2.28@1724.31,235.69
ADC123_IN12: J2.29 J3.29 U1.10 | length 1468.2
  Top w8: U1.10@856.89,640.12 912.45,695.68 v1(931.69,695.68) ; v1(1867.69,155.69) 1932.11,155.69 J3.29@1934.22,157.8
  Route2 w8: v1(1347.69,503.69) 1475.69,503.69 1579.69,399.69 1579.69,275.69 v1(1603.69,251.69)
  Bottom w8: v1(931.69,695.68) 959.69,695.68 1139.69,515.68 1295.69,515.68 1311.69,499.69 1343.69,499.69 v1(1347.69,503.69) ; v1(1603.69,251.69) 1623.69,231.69 1635.69,231.69 1671.69,195.69 1799.69,195.69 1839.69,155.69 v1(1867.69,155.69) 1932.11,155.69 J2.29@1934.22,157.8
ADC123_IN13: J2.30 J3.30 JP6.1 U1.11 | length 1794.5
  Top w8: U1.11@870.8,626.2 912.28,667.68 v1(951.69,667.68) ; J3.30@1725.16,157.8 1785.58,157.8 v1(1787.69,155.69)
  Route2 w8: v1(867.69,163.69) 947.69,243.69 975.69,243.69 1011.69,279.69 1011.69,307.69 1047.69,343.69 1047.69,419.69 v1(1103.69,475.69) ; v1(1491.69,451.69) 1555.69,387.69 1555.69,263.69 v1(1571.69,247.69)
  Bottom w8: v1(867.69,163.69) 867.69,146.69 JP6.1@887.69,126.69 ; v1(951.69,667.68) 963.69,667.68 1131.69,499.69 ; v1(1103.69,475.69) 1107.69,475.69 1131.69,499.69 ; v1(1491.69,451.69) 1463.69,479.69 1303.69,479.69 1283.69,499.69 1131.69,499.69 ; v1(1571.69,247.69) 1603.69,215.69 1623.69,215.69 1681.58,157.8 J2.30@1725.16,157.8 ; J2.30@1723.05,155.69 J2.30@1725.16,157.8 ; v1(1787.69,155.69) 1727.27,155.69 J2.30@1725.16,157.8
ALARM: J2.26 J3.26 Q3.1 R17.2 U1.39 | length 2307.6
  Top w8: Q3.1@350.29,1100.32 350.29,1077.4 365.69,1062 425.69,1062 435.69,1052 435.69,1043.69 v1(443.69,1035.69) ; v1(631.69,1063.69) 631.69,1024 675.69,980 679.69,980 R17.2@679.69,973.28 ; v1(1091.69,671.68) 1083.69,679.68 1083.69,767.68 1095.69,779.68 1095.69,903.69 v1(1079.69,919.69) 1087.69,927.69 1143.69,927.69 1173.49,957.48 U1.39@1174.25,957.48 ; J3.26@1725.16,315.28 1725.57,315.69 v1(1787.69,315.69)
  Route2 w8: v1(1367.69,555.68) 1471.69,555.68 1607.69,419.69 1683.69,419.69 v1(1787.69,315.69)
  Bottom w8: v1(443.69,1035.69) 479.69,1035.69 511.69,1067.69 v1@631.69,1067.69 ; v1(631.69,1063.69) v1@631.69,1067.69 ; v1(1079.69,919.69) 1055.69,943.69 983.69,943.69 923.69,1003.69 855.69,1003.69 791.69,1067.69 v1@631.69,1067.69 ; v1(1091.69,671.68) 1195.69,567.68 1343.69,567.68 1355.69,555.68 v1(1367.69,555.68) ; J2.26@1725.16,315.28 1787.28,315.28 v1(1787.69,315.69)
BOOT0: BOOT0.P$1 R18.2 U1.60 | length 330.3
  Top w8: R18.2@653.69,1156.1 651.69,1154.09 651.69,1131.69 675.69,1107.69 v1(675.69,1015.69) ; v1(763.69,1007.69) 763.69,953.24 U1.60@787.29,929.64
  Bottom w8: v1(675.69,1015.69) 679.69,1011.69 BOOT0.P$1@715.69,1011.69 759.69,1011.69 v1(763.69,1007.69)
CAN2_RX: J2.6 J3.6 U1.33 | length 1046.4
  Top w8: U1.33@1257.77,873.96 1267.69,864.04 v1(1267.69,843.69) ; J3.6@1725.16,1102.68 1786.68,1102.68 v1(1787.69,1103.69) 1815.69,1075.69 v1(1815.69,823.68)
  Bottom w8: v1(1267.69,843.69) 1267.69,823.68 1299.69,791.68 1627.69,791.68 1659.69,823.68 v1(1815.69,823.68) ; J2.6@1725.16,1102.68 1726.17,1103.69 v1(1787.69,1103.69)
CAN2_TX: J2.5 J3.5 U1.34 | length 1105.7
  Top w8: U1.34@1243.85,887.89 1263.64,907.69 v1(1287.69,907.69) ; v1(1843.69,911.69) 1843.69,1079.69 v1(1867.69,1103.69) 1868.7,1102.68 J3.5@1934.22,1102.68
  Bottom w8: v1(1287.69,907.69) 1291.69,903.69 1291.69,823.68 1307.69,807.68 1611.69,807.68 1647.69,843.69 1647.69,895.69 1659.69,907.69 1839.69,907.69 v1(1843.69,911.69) ; v1(1867.69,1103.69) 1933.21,1103.69 J2.5@1934.22,1102.68
GND: C1.2 C2.2 C3.2 C4.1 C5.2 C6.C C7.2 C8.2 C9.2 C10.2 C11.2 C12.2 C13.C C14.2 C15.2 C16.2 C17.1 C18.2 C19.2 C20.2 C21.2 C22.2 C23.2 C25.2 C26.2 C27.C C28.2 J1.15 J2.3 J2.4 J2.27 J3.3 J3.4 J3.27 J4.5 J5.GND J5.GND1 J5.GND2 J5.GND3 J5.GND4 J6.3 J6.5 J6.9 Q1.3 Q2.3 Q3.2 R5.2 R12.1 R13.1 R17.1 R18.1 R21.1 S1.B3 U1.12 U1.18 U1.63 U2.2 U3.2 U4.2 U5.4 U6.1 U7.2 U8.1 U8.2 U8.3 U8.4 U10.3 U11.9 U11.11 U12.8 U12.9 U12.10 U12.11 U12.12 U12.13 U14.1 U14.11 U14.18 U$5.6 X1.2 X1.4 | length 5569.7
  Top w10: v1(351.69,871.69) 369.85,889.84 U3.2@369.85,910.67 ; U4.2@369.85,710.66 369.85,754.16 379.69,764 435.38,764 v1(435.69,763.68) ; v1(389.69,1085.69) 404.32,1100.32 Q3.2@425.09,1100.32 ; U5.4@409.22,496.66 409.22,461.21 v1(391.69,443.69) 411.69,423.69 511.69,423.69 549.28,461.28 R21.1@549.28,463.69 ; C2.2@471.69,798.09 478.1,798.09 511.69,831.68 v1(511.69,851.69) ; v1(483.69,967.69) 489.85,961.53 U2.2@489.85,910.67 ; C1.2@483.69,1205.28 483.69,1243.69 v1(499.69,1259.69) ; C5.2@524.69,344.1 R12.1@578.69,344.1 578.69,333.69 v1(605.69,306.69) ; U8.1@586.3,75.2 U8.2@611.89,75.2 U8.3@637.49,75.2 U8.4@663.08,75.2 683.69,95.81 683.69,115.69 v1(687.69,119.69) ; v1(607.69,1259.69) 597.69,1249.69 C17.1@597.69,1207.28 R18.1@653.69,1207.28 ; v1(667.69,731.68) 667.69,719.68 X1.2@699.73,687.65 ; S1.B3@678.56,1357.23 682.56,1353.23 715.23,1353.23 J6.9@742.69,1380.69 J6.5@842.69,1380.69 J6.3@892.69,1380.69 ; R17.1@679.69,922.1 R17.1@683.69,918.09 ; C10.2@681.08,849.27 683.69,846.67 v1(683.69,883.69) R17.1@683.69,918.09 ; U1.63@745.53,887.89 715.32,918.09 R17.1@683.69,918.09 ; v1(863.69,59.69) 863.69,91.69 877.28,105.28 C28.2@903.69,105.28 902.81,106.16 U14.11@960.95,106.16 ; U1.12@884.73,612.28 916.13,643.68 v1(931.69,643.68) ; v1(899.69,267.69) 903.69,263.69 C26.2@903.69,233.28 ; U11.9@957.23,342.69 U11.9@957.76,342.16 981.22,342.16 991.69,331.69 994.1,331.69 C23.2@1014.1,311.69 ; U11.11@957.76,381.53 981.53,381.53 v1(995.69,395.69) ; v1(975.69,311.69) C23.2@1014.1,311.69 ; v1(995.69,575.68) 1055.69,515.68 ; C22.2@1014.28,486.28 C22.2@1014.28,488.69 1021.6,496 1031.69,496 1051.38,515.68 1055.69,515.68 ; C23.2@1014.69,311.1 C23.2@1014.1,311.69 ; R13.1@1019.69,1170.28 R13.1@1024.87,1170.28 ; R13.1@1023.69,1169.1 R13.1@1024.87,1170.28 ; U1.18@1062.9,570.52 1083.69,549.73 1083.69,531.68 1067.69,515.68 1055.69,515.68 ; U14.18@1088.9,56.94 1122.43,56.94 v1(1123.69,55.69) 1124.95,56.94 C20.2@1174.54,56.94 ; U14.1@1088.9,214.43 1088.9,256.9 v1(1091.69,259.69) ; C12.2@1135.69,1220.28 C9.2@1077.69,1220.28 1027.69,1170.28 R13.1@1024.87,1170.28 ; C20.2@1171.69,54.1 C20.2@1174.54,56.94 ; v1(1191.69,359) 1194.69,362 C18.2@1194.69,390.1 C18.2@1202.44,397.84 ; J5.GND3@1207.26,1236.82 1207.26,1267.26 1207.69,1267.69 J5.GND3@1211.69,1267.69 ; C11.2@1306.69,644.09 1306.69,570.28 R5.2@1310.28,566.68 1326.69,566.68 1347.69,587.68 v1(1407.69,587.68) ; 1378.49,74.49 U12.13@1378.49,93.3 1378.49,76.88 1387.69,67.69 ; C16.2@1419.69,444.1 1420.1,443.69 1447.69,443.69 v1(1455.69,451.69) ; U6.1@1419.69,723.68 U6.1@1438.69,704.68 ; C25.2@1427.69,66.1 1426.1,67.69 1387.69,67.69 ; Q1.3@1468.45,1094.29 1510.29,1094.28 v1(1515.69,1099.69) ; C21.2@1477.28,235.69 v1(1511.69,235.69) ; C13.C@1601.81,307.69 C13.C@1599.81,309.69 C13.C@1619.69,329.57 ; C27.C@1627.69,1162.81 C27.C@1646.3,1181.42 ; C14.2@1639.1,449.69 C14.2@1644.69,444.1 ; J3.4@1725.16,1181.42 J3.4@1726.89,1179.69 ; v2(1867.69,235.69) v2@1868.54,236.54 ; v2(1867.69,1179.69) v2@1867.69,1181.42 ; C20.2@1174.54,56.94 1177.28,59.69 1211.69,59.69 1228.89,76.88 U12.8@1228.89,93.3 1228.89,62.49 v1(1231.69,59.69) 1234.49,56.88 U12.9@1265.3,56.89 U12.10@1290.89,56.89 U12.11@1316.49,56.89 U12.12@1342.08,56.89 1372.89,56.88 v1(1375.69,59.69) 1383.69,67.69 1387.69,67.69
  Top w12: C3.2@656.86,536.67 656.86,544.85 675.69,563.68 699.93,563.68 X1.4@713.66,577.4 768.53,522.51 C4.1@776.86,522.51 ; X1.2@699.73,685.96 X1.2@699.73,687.65 ; C4.1@769.67,530.52 776.86,523.31 C4.1@776.86,522.51 ; v1(779.69,471.69) 776.86,474.51 C4.1@776.86,522.51 ; C15.2@821.69,471.69 C15.2@822.92,472.92
  Top w15: v1(775.69,251.69) 787.69,251.69 807.69,271.69 807.69,286.09 C19.2@813.28,291.69 ; v1(1107.69,1267.69) 1127.38,1248 1127.69,1248 1135.69,1240 C12.2@1135.69,1220.28 ; J5.GND3@1207.26,1236.82 1226.95,1217.64 J5.GND@1254.51,1217.13 ; J5.GND2@1404.12,1236.82 1405.25,1267.69 J5.GND2@1422.67,1267.69 ; C16.2@1419.69,444.1 C16.2@1425.28,449.69
  Top w16: v1(175.69,480) 175.69,416.88 214.29,378.28
  Top w20: v1(687.69,119.69) 691.08,123.08 U10.3@728.38,123.08 ; v1(779.69,471.69) C15.2@821.69,471.69 ; J5.GND4@1189.55,1327.37 1189.55,1350.14 1207.69,1332 1207.69,1269.24 J5.GND3@1207.26,1236.82 ; C11.2@1306.69,644.09 C8.2@1360.69,644.09 1378.1,644.09 U6.1@1438.69,704.68 ; v1(1395.69,723.68) U6.1@1419.69,723.68 ; J5.GND2@1404.12,1236.82 1403.69,1269.24 1403.69,1336 1421.83,1354.14 J5.GND1@1421.83,1327.37 ; U7.2@1575.88,449.69 C14.2@1639.1,449.69 ; C13.C@1601.81,307.69 v1(1651.69,307.69) ; C13.C@1619.69,329.57 1619.69,419.09 C14.2@1644.69,444.1
  Top w25: v3(163.69,303.69) 190.43,330.43 J4.5@241.61,330.43 ; J4.5@215.69,332 214.29,333.4 214.29,378.28 Q2.3@236.45,378.29 ; v1(1107.69,1267.69) J5.GND3@1207.69,1267.69 ; J5.GND2@1422.67,1267.69 v1(1459.69,1267.69) ; v1(1519.69,555.68) C6.C@1569.81,555.68 1527.1,598.39 C7.2@1527.1,625.68 ; C27.C@1646.3,1181.42 J3.4@1725.16,1181.42
  Top w40: v3(179.69,1275.69) 180.18,1276.17 J1.15@241.61,1276.18 ; J3.4@1726.89,1179.69 v2(1791.69,1179.69) ; v2@1867.69,1181.42 J3.3@1934.22,1181.42 ; v2@1868.54,236.54 J3.27@1934.22,236.54
  Bottom w10: v1(899.69,267.69) v1@903.69,263.69 ; J2.4@1725.16,1181.42 J2.4@1726.89,1179.69 ; v2(1867.69,235.69) v2@1868.54,236.54 ; J2.3@1932.49,1179.69 J2.3@1934.22,1181.42
  Bottom w16: v1(175.69,480) 175.85,479.84 U$5.6@229.52,479.84
  Bottom w40: J2.4@1726.89,1179.69 v2(1791.69,1179.69) ; v2(1867.69,1179.69) J2.3@1932.49,1179.69 ; v2@1868.54,236.54 J2.27@1934.22,236.54
GPIO1: U1.24 U5.2 | length 1202.9
  Top w8: U5.2@369.85,496.66 369.85,470.16 367.69,468 367.69,423.69 v1(371.69,419.69) ; v1(1107.69,747.68) 1099.69,739.68 1099.69,700.76 U1.24@1146.41,654.04
  Route2 w8: v1(371.69,419.69) 371.69,420 367.69,424 367.69,455.69 391.69,479.69 503.69,479.69 539.69,515.68 v1(551.69,515.68)
  Bottom w8: v1(551.69,515.68) 551.69,535.68 585.69,569.68 671.69,569.68 725.69,623.68 725.69,709.68 819.69,803.68 947.69,803.68 1003.69,747.68 v1(1107.69,747.68)
GPIO2: U1.25 U5.3 | length 1227.9
  Top w8: v1(307.69,512) 323.69,528 383.69,528 389.53,522.16 U5.3@389.53,496.66 ; v1(1123.69,719.68) 1123.69,704.6 U1.25@1160.33,667.96
  Route2 w8: v1(307.69,512) 399.69,512 419.69,532 447.69,532 459.69,520 459.69,508 471.69,496 495.69,496 543.37,543.68 v1(595.69,543.68)
  Bottom w8: v1(595.69,543.68) 671.69,543.68 743.69,615.68 743.69,699.68 831.69,787.68 935.69,787.68 995.69,727.68 1084.01,727.68 1091.69,720 1123.69,720 v1(1123.69,719.68)
GPIO_DIR: R21.2 U1.2 U5.5 | length 666.5
  Top w8: U5.5@409.22,618.7 409.22,590.16 479.69,519.68 v1(483.69,519.68) 498.1,503.69 R21.2@498.1,463.69 ; U1.2@745.53,751.47 771.69,777.64 v1(771.69,791.68)
  Route2 w8: v1(483.69,519.68) 555.69,591.68 555.69,595.68 643.69,683.68 v1(643.69,707.68)
  Bottom w8: v1(643.69,707.68) 695.69,707.68 771.69,783.68 v1(771.69,791.68)
GPIO_EXT1: J1.3 J2.24 J3.24 U5.7 | length 1753.7
  Top w8: J1.3@241.61,685.63 243.23,684 283.69,684 320.01,647.68 359.69,647.68 369.85,637.53 U5.7@369.85,618.7 369.85,581.53 370.16,581.53 427.69,524 427.69,512 v1(435.69,504) ; v1(1659.69,395.69) 1661.36,394.02 J3.24@1725.16,394.02
  Bottom w8: v1(435.69,504) 448.01,491.69 667.37,491.69 719.69,544 931.38,544 1047.69,427.69 1216.01,427.69 1247.69,396 1659.38,396 v1(1659.69,395.69) 1661.36,394.02 J2.24@1725.16,394.02
GPIO_EXT2: J1.4 J2.25 J3.25 U5.6 | length 2083
  Top w8: J1.4@241.61,734.84 244.45,732 283.69,732 291.69,724 291.69,700 328.01,663.68 371.69,663.68 389.53,645.84 U5.6@389.53,618.7 389.53,585.84 459.69,515.68 459.69,459.69 v1(455.69,455.69) ; v1(1867.69,315.69) 1868.1,315.28 J3.25@1934.22,315.28
  Bottom w8: v1(455.69,455.69) 475.69,475.69 675.37,475.69 727.69,528 923.38,528 1039.69,411.69 1208.01,411.69 1239.69,380 1635.38,380 1659.69,355.69 1827.69,355.69 v1(1867.69,315.69) 1933.81,315.69 J2.25@1934.22,315.28
GYRO_CS: U1.3 U12.5 | length 904.5
  Top w8: U1.3@759.45,737.56 785.58,763.68 v1(843.69,763.68) ; v1(1059.69,479.69) 1107.69,431.69 1107.69,307.69 1147.69,267.69 1211.69,267.69 1228.89,250.49 U12.5@1228.89,170.08
  Bottom w8: v1(843.69,763.68) 863.69,763.68 903.69,723.68 903.69,623.68 1047.69,479.69 v1(1059.69,479.69)
I2C1_SCL: R3.1 U1.61 | length 158
  Top w8: R3.1@769.69,1044.1 764.1,1044.09 739.69,1019.69 739.69,949.41 U1.61@773.37,915.73
I2C1_SCL_EXT: I2C1_SCL_MOTOR.P$1 J1.14 R1.1 R3.2 | length 1056.5
  Top w8: v1(131.69,1075.69) 132.01,1076 135.69,1076 167.69,1108 167.69,1196 199.69,1228 240.57,1228 J1.14@241.61,1226.97 ; R1.1@767.69,1169.1 767.69,1135.69 v1(763.69,1131.69) 769.69,1125.69 R3.2@769.69,1095.28
  Bottom w8: v1(131.69,1075.69) 140.01,1084 159.69,1084 203.38,1127.69 459.69,1127.69 495.69,1163.69 771.26,1163.69 I2C1_SCL_MOTOR.P$1@799.64,1135.31 796.02,1131.69 v1(763.69,1131.69)
I2C1_SDA: R4.1 U1.62 | length 162.1
  Top w8: R4.1@711.69,1044.1 711.69,1023.69 719.69,1015.69 719.69,943.69 759.45,903.93 U1.62@759.45,901.81
I2C1_SDA_EXT: I2C1_SDA_MOTOR.P$1 J1.13 R2.1 R4.2 | length 924.9
  Top w8: v1(143.69,1043.69) 191.69,1091.69 191.69,1168 201.44,1177.75 J1.13@241.61,1177.75 ; R4.2@711.69,1095.28 711.69,1115.69 v1(731.69,1135.69) 711.69,1155.69 R2.1@711.69,1169.1
  Bottom w8: v1(143.69,1043.69) 211.69,1111.69 467.69,1111.69 503.69,1147.69 687.26,1147.69 I2C1_SDA_MOTOR.P$1@699.64,1135.31 731.31,1135.31 v1(731.69,1135.69)
I2C2_SCL: I2C2_SCL.P$1 J2.17 J3.17 R20.1 U1.29 U8.6 U10.8 U11.1 | length 2082.7
  Top w8: R20.1@635.69,341.09 R20.1@632.69,344.1 632.69,310.69 637.49,305.89 U8.6@637.49,264.18 637.49,225.89 v1(639.69,223.69) ; v1(799.69,403.69) 802.16,401.21 U11.1@841.62,401.22 ; U1.29@1216.01,723.63 1239.69,699.95 1239.69,659.68 v1(1235.69,655.68) ; v1(1867.69,627.68) 1870.24,630.24 J3.17@1934.22,630.24
  Top w10: U10.8@815,221.51 817.51,221.5 839.69,243.69 839.69,247.69 v1(847.69,255.69)
  Route2 w8: v1(799.69,403.69) 799.69,424 831.69,456 915.69,456 1099.69,640 1219.06,640 1219.38,639.68 1235.69,656 v1(1235.69,655.68)
  Bottom w8: v1(639.69,223.69) 659.69,243.69 726.87,243.69 762.87,279.69 ; 779.69,279.69 762.87,279.69 ; v1(799.69,403.69) 770.02,374.02 I2C2_SCL.P$1@763.91,374.02 751.69,361.8 751.69,290.87 762.87,279.69 ; v1(847.69,255.69) 823.37,280 763.19,280 762.87,279.69 ; v1(1235.69,655.68) 1235.69,635.68 1255.69,615.68 1603.69,615.68 1627.69,591.68 1831.69,591.68 v1(1867.69,627.68) 1870.24,630.24 J2.17@1934.22,630.24